# EAGLE board MOM-LED-v06 (EAGLE 8.1.0)
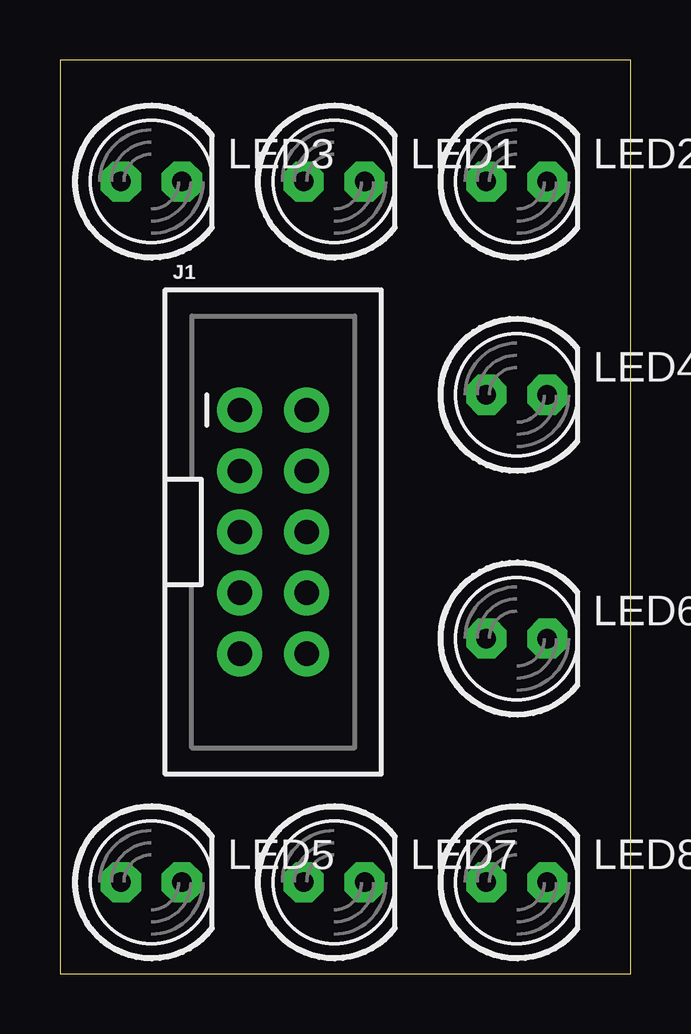
[diagram p0: board, top side]
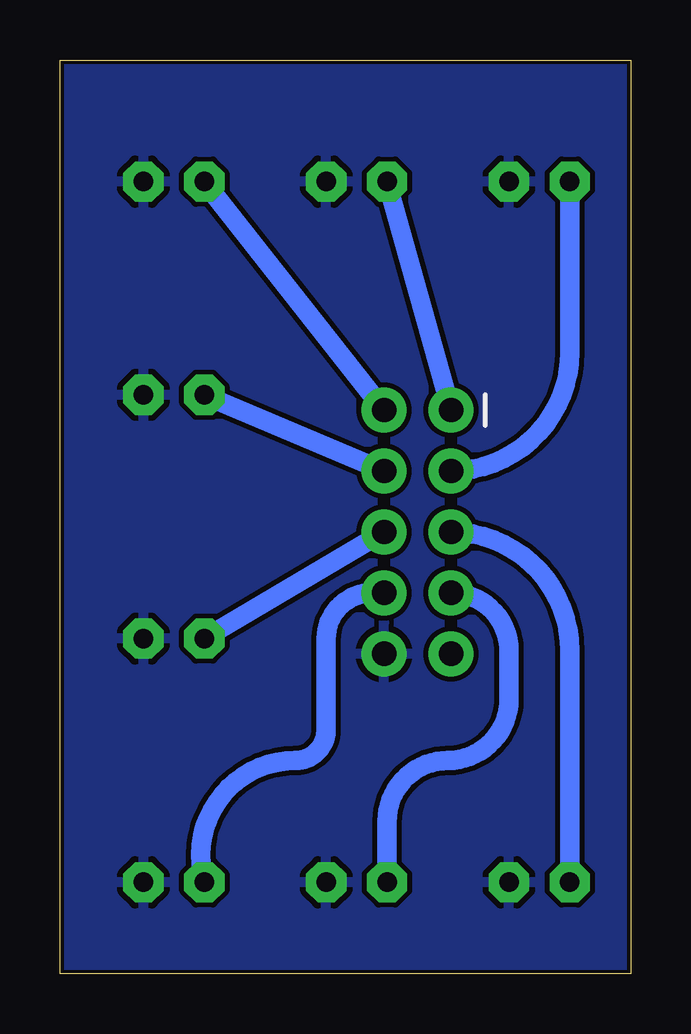
[diagram p1: board, bottom side, seen from below]

Size 23.8 x 38.09 mm. Coordinates in mm from the lower left corner, seen from the top.
Outline: 0,0 23.8,0 23.8,38.09 0,38.09 0,0
Copper layers (1*16): Top 0.035mm / dielectric 1.5mm / Bottom 0.035mm
Design rules "default *": minimum track width 12mil, minimum drill 12mil, track to track 8mil, track to pad 8mil, pad to pad 8mil, via to via 8mil, smd to smd 8mil, copper to edge 6mil, drill to drill 6mil, minimum pad ring 6mil, minimum via ring 6mil, stop-mask expansion 4mil, vias tented up to drill 0mil, thermal gap 10mil
Net classes: 0 default: width 0.305 mm, clearance 0.152 mm; 1 GND: width 0.508 mm, clearance 0.152 mm; 2 Power: width 0.508 mm, clearance 0.152 mm

## Footprints (pad centres in the part's own frame; a part is rotated, then mirrored left to right if it is on the bottom)
2X5-SHROUDED_LOCK = drill 1.016 pad 1.88: 1 -1.397,5.08; 2 1.397,5.08; 3 -1.397,2.54; 4 1.397,2.54; 5 -1.397,0; 6 1.397,0; 7 -1.397,-2.54; 8 1.397,-2.54; 9 -1.397,-5.08; 10 1.397,-5.08
LED5MM = drill 0.813 pad 1.676 octagon: A -1.27,0; K 1.27,0

## Placement (x,y rotation side)
J1  [2X5-SHROUDED_LOCK]  8.89,18.41 0 top
LED1  [LED5MM]  11.43,33.02 0 top
LED2  [LED5MM]  19.05,33.02 0 top
LED3  [LED5MM]  3.81,33.02 0 top
LED4  [LED5MM]  19.05,24.13 0 top
LED5  [LED5MM]  3.81,3.81 0 top
LED6  [LED5MM]  19.05,13.97 0 top
LED7  [LED5MM]  11.43,3.81 0 top
LED8  [LED5MM]  19.05,3.81 0 top

## Library data of the parts
J1 = SparkFun-Connectors; PROD_ID: CONN-08671; SF_ID: PRT-08506
LED1-LED8 = adafruit

## Nets
GND: J1.10 LED1.K LED2.K LED3.K LED4.K LED5.K LED6.K LED7.K LED8.K
MOT_AIN_1: J1.2 LED2.A
MOT_AIN_2: J1.6 LED6.A
MOT_BIN_1: J1.4 LED4.A
MOT_BIN_2: J1.8 LED8.A
MOT_PWMA_1: J1.1 LED1.A
MOT_PWMA_2: J1.5 LED5.A
MOT_PWMB_1: J1.3 LED3.A
MOT_PWMB_2: J1.7 LED7.A
VCC: J1.9

## Tracks (layer width: path | path; a pad name or v marks a point on that pad's centre or on a via)
GND
  pour Bottom: 0,0 24.13,0 24.13,38.1 0,38.1
MOT_AIN_1
  Bottom 0.813: J1.2 LED2.A
MOT_AIN_2
  Bottom 0.813: J1.6 LED6.A
MOT_BIN_1
  Bottom 0.813: J1.4 LED4.A
MOT_BIN_2
  Bottom 0.813: J1.8 10.79,15.88 arc-90 12.7,13.97 12.7,10.16 arc90 13.97,8.89 arc-106 LED8.A
MOT_PWMA_1
  Bottom 0.813: J1.1 LED1.A
MOT_PWMA_2
  Bottom 0.813: J1.5 arc90 2.54,13.46 LED5.A
MOT_PWMB_1
  Bottom 0.813: J1.3 arc-90 2.54,25.91 LED3.A
MOT_PWMB_2
  Bottom 0.813: J1.7 arc90 5.08,13.46 5.08,11.43 arc90 7.62,8.89 arc-90 10.16,6.35 LED7.A